# Altium PCB PCB.PcbDoc
Units mm, origin at the board's own origin, x right, y up, seen from the top; angles counter-clockwise.
Board outline 95.2 x 56.6 mm, 2 copper layers (Top Layer, Bottom Layer); 21 components, 25 nets, 99 pads, 0 vias.
Unrouted connection lines stored in the file: 1.
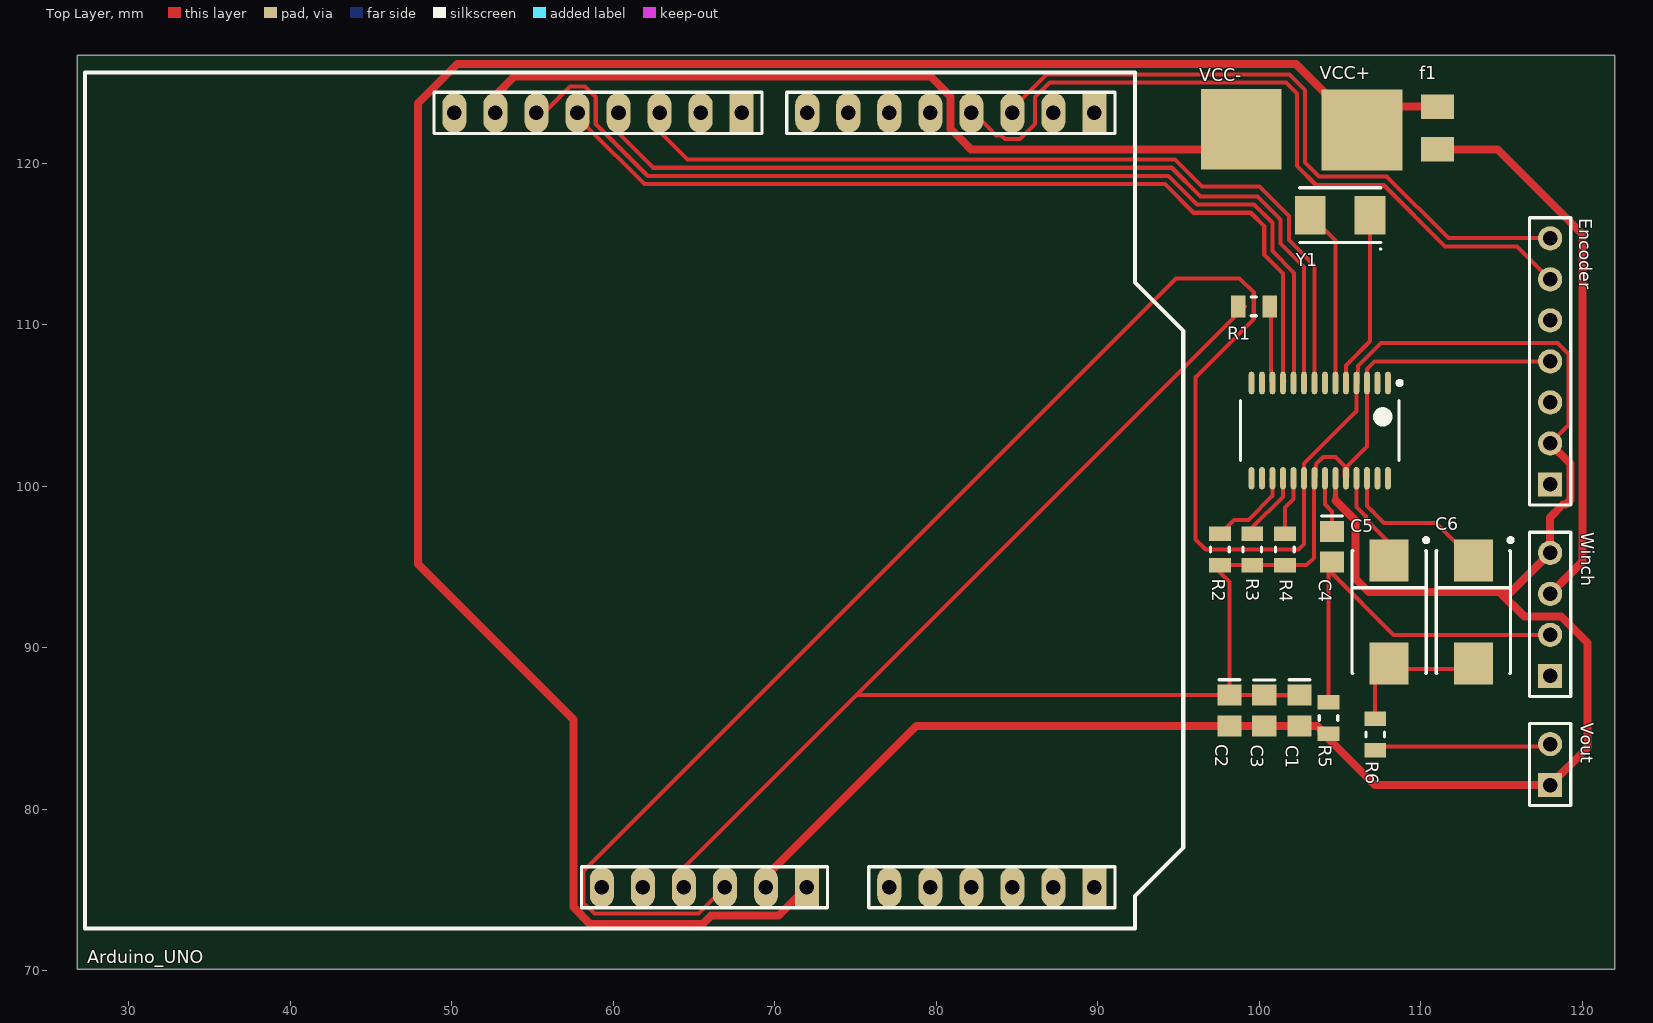
[diagram p0: Top Layer view]
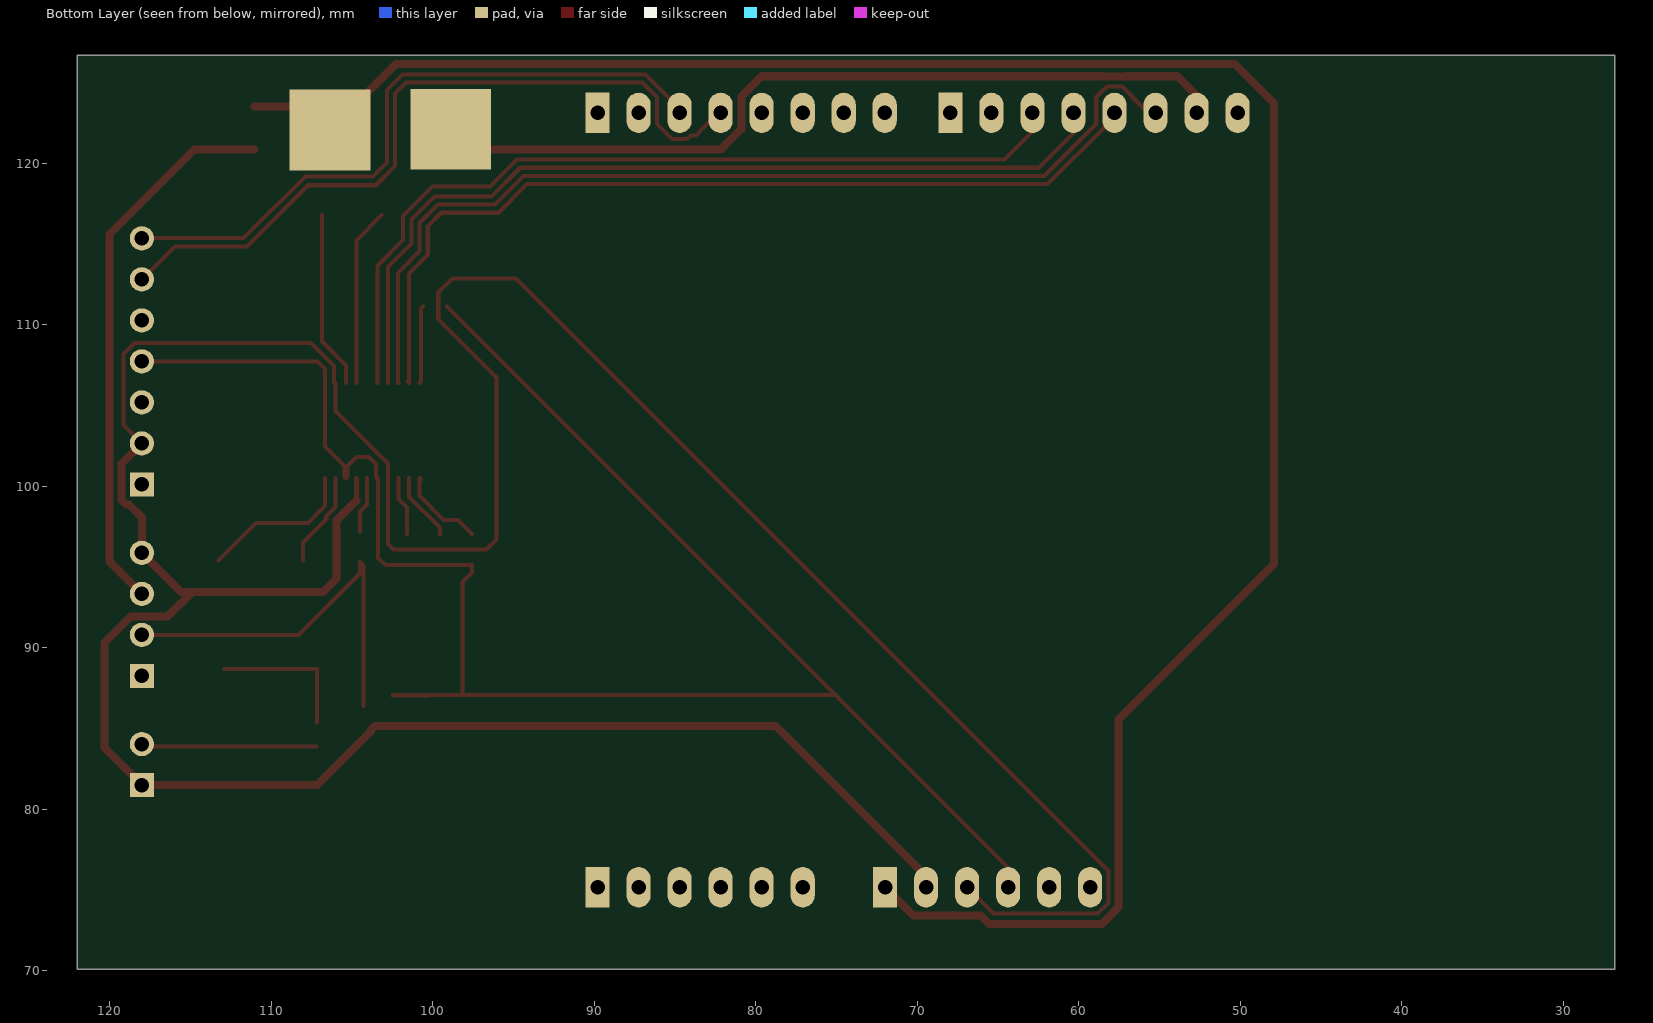
[diagram p1: Bottom Layer view, seen from below]

## Layer stack, top to bottom
Top Solder: solder mask 0.0102, Solder Resist, Dk 3.5
Top Layer: signal copper 0.0356
Dielectric 1: dielectric 0.32, FR-4, Dk 4.8
Bottom Layer: signal copper 0.0356
Bottom Solder: solder mask 0.0102, Solder Resist, Dk 3.5

## Board outline
26.825,70.1 122.025,70.1 122.025,126.425 122.025,126.575 122.025,126.6 122.025,126.7 26.825,126.7

## Design rules (kind name [scope] priority, off if disabled: settings)
Clearance [All] p1: gap=0.254
PolygonConnect [All] p1: connectstyle=Relief reliefconductorwidth=0.254 reliefentries=4 polygonreliefangle="90 Angle" airgapwidth=0.254
RoutingVias [All] p1: holewidth=0.711 width=1.27 viastyle="Through Hole" minholewidth=0.711 minwidth=1.27 maxholewidth=0.711 maxwidth=1.27
SolderMaskExpansion [All] p1: expansion=0.102
Width [All] p1: maxlimit=0.5 minlimit=0.254 preferedwidth=0.254 bottomlayer_maxwidth=0.254 minimp=50.000000 maximp=50.000000 favimp=50.000000
30 further rules are at their usual default settings.

## Classes and differential pairs
component class Schematic: Arduino_UNO C1 C2 C3 C4 C5 C6 Encoder f1 R1 R2 R3 R4 R5 R6

## Components (designator, comment, footprint, x,y, rotation, side; value= is the part's Value field where it differs from the comment)
Arduino_UNO "MCU" MCU 27.309,72.634 r90 top
C1 "C0805" 0805 102.5,86.125 r270 top
C2 "C0805" 0805 98.167,86.128 r270 top
C3 "C0805" 0805 100.326,86.123 r270 top
C4 "C0805" 0805 104.525,96.275 r270 top
C5 "T491D" D 108.05,92.225 r270 top
C6 "T491D" D 113.275,92.225 r270 top
Encoder "Header 7" HDR1X7 118.025,100.125 r90 top
f1 "Bel Fuse" Bel_Fuse 111.05,122.2 r90 top
R1 "Res3" RESC2012 99.675,111.15 r0 top
R2 "Res3" RESC2012 97.575,96.087 r270 top
R3 "Res3" RESC2012 99.575,96.1 r270 top
R4 "Res3" RESC2012 101.6,96.1 r270 top
R5 "Res3" RESC2012 104.3,85.675 r90 top
R6 "Res3" RESC2012 107.2,84.65 r270 top
VCC+ "VCC_IN+" VCC_Pad 106.35,122.025 r0 top
VCC- "VCC_IN-" VCC_Pad 98.875,122.075 r0 top
Vout "Header 2" HDR1X2 118.025,81.51 r90 top
Winch "Header 4" HDR1X4 118.025,88.27 r90 top
Y1 "XTAL" ABM3-27.000MHZ-D2Y-T 105.025,116.8 r180 top
? "MAX7456" TSSOP(max7456)NoPad 103.759,103.458 r270 top

## Footprints (in the part's own frame and the unit in brackets; to place one, negate y for a bottom-side part, rotate by r counter-clockwise, add the part's x,y. Pads: shape width x height; smd on the part's side, far side on the other; paste and mask are expansions set on the pad)
0805 [mm] "Chip Capacitor; Body 2.0 x 1.2 mm (LxW typ)"
  rect 1.3x1.5 smd: 1(-0.95,0) 2(0.95,0)
  silkscreen extent -1.9,-0.65 -1.9,0.65
ABM3-27.000MHZ-D2Y-T [mm] "DFN, 2-Leads, Body 3,30x5,01mm, Pitch 3,70mm, IPC Medium Density"
  rect 1.9x2.4 smd: 1(-1.85,0) 2(1.85,0)
  silkscreen extent -2.56,-1.7 2.51,2.15, body extent -2.51,-1.7 2.51,1.7, height 1.3
Bel_Fuse [mm] "Molded Capacitor, 2-Leads, Body 3,30x1,59mm, IPC Medium Density"
  rect 1.52x2.03 smd: 1(-1.325,0) 2(1.325,0)
  body extent -1.92,-0.8 1.92,0.8, height 0.6
D [mm] "Capacitor, SM Tantalum; Body 7.3 x 4.3 mm (LxW typ)"
  rect 2.6x2.4 smd: 1(-3.2,0) 2(3.2,0)
  silkscreen extent -4.57,-2.3 3.8,2.43
HDR1X2 [mm] "Connector; Header; 2 Position"
  rect 1.5x1.5 hole 0.9: 1(0,0)
  round 1.5 hole 0.9: 2(2.54,0)
  silkscreen extent -1.27,-1.27 3.81,1.27
HDR1X4 [mm] "Connector; Header; 4 Position"
  rect 1.5x1.5 hole 0.9: 1(0,0)
  round 1.5 hole 0.9: 2(2.54,0) 3(5.08,0) 4(7.62,0)
  silkscreen extent -1.27,-1.27 8.89,1.27
HDR1X7 [mm] "Connector; Header; 7 Position"
  rect 1.5x1.5 hole 0.9: 1(0,0)
  round 1.5 hole 0.9: 2(2.54,0) 3(5.08,0) 4(7.62,0) 5(10.16,0) 6(12.7,0) 7(15.24,0)
  silkscreen extent -1.27,-1.27 16.51,1.27
MCU [mm]
  rect 2.5x1.5 hole 0.9: 0(50.5,-62.5) 8(50.5,-40.65) A5(2.55,-62.5) Vin(2.55,-44.7)
  oval 2.5x1.5 hole 0.9: 1(50.5,-59.96) 2(50.5,-57.42) 3(50.5,-54.88) 3.3V(2.55,-34.54) 4(50.5,-52.34) 5(50.5,-49.8) 5V(2.55,-37.08) 6(50.5,-47.26) 7(50.5,-44.72) 9(50.5,-38.11) 10(50.5,-35.57) 11(50.5,-33.03) 12(50.5,-30.49) 13(50.5,-27.95) A0(2.55,-49.8) A1(2.55,-52.34) A2(2.55,-54.88) A3(2.55,-57.42) A4(2.55,-59.96) AREF(50.5,-22.87) GND(2.55,-42.16) GND(2.55,-39.62) GND(50.5,-25.41) RST(2.55,-32)
  silkscreen extent 0,-68 53,0
RESC2012 [mm] "Chip Resistor, 2-Leads, Body 2,05x1,30mm, IPC Medium Density"
  rect 0.9x1.35 smd: 1(-0.975,0) 2(0.975,0)
  silkscreen extent -0.15,-0.58 0.15,0.58, body extent -1.05,-0.67 1.05,0.67, height 0.6
TSSOP(max7456)NoPad [mm] "TSOP, 28-Leads, Body 9,70x4,40mm, Pitch 0,65mm, Thermal Pad 3,10x3,90mm, IPC Medium Density"
  oval 1.4x0.35 smd: 1(-2.95,4.225) 2(-2.95,3.575) 3(-2.95,2.925) 4(-2.95,2.275) 5(-2.95,1.625) 6(-2.95,0.975) 7(-2.95,0.325) 8(-2.95,-0.325) 9(-2.95,-0.975) 10(-2.95,-1.625) 11(-2.95,-2.275) 12(-2.95,-2.925) 13(-2.95,-3.575) 14(-2.95,-4.225) 15(2.95,-4.225) 16(2.95,-3.575) 17(2.95,-2.925) 18(2.95,-2.275) 19(2.95,-1.625) 20(2.95,-0.975) 21(2.95,-0.325) 22(2.95,0.325) 23(2.95,0.975) 24(2.95,1.625) 25(2.95,2.275) 26(2.95,2.925) 27(2.95,3.575) 28(2.95,4.225)
  silkscreen extent -3.07,-4.9 1.85,5.08, body extent -3.19,-4.9 3.19,4.9, height 1.1
VCC_Pad [mm]
  rect 5x5 all layers, no hole: 0(0.025,0.05)

## Part data
C1 C2 C3 C4: "Ceramic Chip Capacitor - Standard"
C5 C6: "Solid Tantalum Chip Capacitor, Standard T491 Series - Industrial Grade"
Encoder: "Header, 7-Pin"
R1 R2 R3 R4 R5 R6: "Resistor"
Vout: "Header, 2-Pin"
Winch: "Header, 4-Pin"
Y1: "Crystal Oscillator"

## Nets (pads, with @x,y where several pads share a name; then routed paths per layer and width w, separated by ;. In a path a pad name is that pad's centre, name@x,y a point inside that pad or via, vN(x,y) a via of type N, cw(c..) or ccw(c..) an arc to the next point about the centre after c; other vN are vias at no path point)
CASEGND: Encoder.1
CS: ?.8 Arduino_UNO.10 | length 53.3
  Top Layer w0.254: Arduino_UNO.10 62.879,121.971 64.609,120.241 85.72,120.241 85.723,120.244 94.806,120.244 96.475,118.575 100.025,118.575 101.844,116.756 101.844,115.256 103.434,113.666 ?.8
GND: ?.4 ?.20 ?.23 Arduino_UNO.GND C1.2 C2.2 C3.2 Encoder.2 R5.1 VCC-.0 Vout.1 Winch.4 | length 275.6
  Top Layer w0.254: Arduino_UNO.GND@52.719,123.134 Arduino_UNO.GND@52.719,124.219 ; Arduino_UNO.GND@66.929,75.184 65.295,73.55 58.844,73.55 58.178,74.216 58.178,74.447 58.178,76.203 94.85,112.875 98.8,112.875 99.675,112 99.675,110.361 96.075,106.761 96.075,96.725 96.7,96.1 102.45,96.1 102.775,96.425 102.775,100.499 ?.20 102.784,101.409 106.034,104.659 ?.4 106.128,106.408 106.128,107.454 107.55,108.876 118.493,108.876 119.156,108.213 119.156,103.796 Encoder.2 ; VCC-.0@97.65,120.875 VCC-.0 VCC-.0@98.975,122.05 ; C3.2@100.321,85.178 C3.2 ; C1.2 C1.2 ; R5.1@103.85,84.825 R5.1@103.85,84.925
  Top Layer w0.3: 104.734,99.141 ?.23
  Top Layer w0.5: Arduino_UNO.GND@52.719,124.219 53.9,125.4 57.065,125.4 57.069,125.396 58.529,125.396 58.533,125.4 79.656,125.4 80.903,124.153 80.903,122.147 81.67,121.38 82.175,120.875 83.996,120.875 83.999,120.872 85.459,120.872 85.462,120.875 VCC-.0@97.65,120.875 ; Arduino_UNO.GND@69.469,75.184 69.469,75.869 78.778,85.178 C2.2 C3.2@100.321,85.178 ; C3.2 C1.2 ; C1.2 103.6,85.175 R5.1@103.85,84.925 ; R5.1@103.85,84.825 107.165,81.51 Vout.1 120.35,83.835 120.35,90.3 118.709,91.941 116.434,91.941 114.9,93.475 ; 104.734,99.141 105.975,97.9 105.975,94.287 106.641,93.621 106.654,93.621 106.8,93.475 114.9,93.475 ; Encoder.2 119.279,101.411 119.279,99.166 118.984,98.871 118.81,98.871 118.025,98.086 Winch.4 115.61,93.475 114.9,93.475
INDEX: Encoder.5
Net_5: ?.5 Y1.1 | length 11
  Top Layer w0.254: ?.5 105.384,107.496 106.879,108.991 106.879,116.796 Y1.1
Net_6: ?.6 Y1.2 | length 11
  Top Layer w0.254: Y1.2 104.734,115.241 ?.6
Net_12: ?.12 R1.2 | length 4.8
  Top Layer w0.254: R1.2@100.625,111.15 100.74,111.035 100.74,106.502 ?.12 ?.12@100.838,106.412
Net_17: ?.17 R2.1 | length 5.5
  Top Layer w0.254: R2.1@97.612,97.062 R2.1 98.447,97.934 99.341,97.934 100.834,99.427 ?.17 ?.17@100.74,100.414
Net_18: ?.18 R3.1 | length 4.2
  Top Layer w0.254: R3.1 99.575,97.45 101.484,99.359 ?.18 ?.18@101.473,100.497
Net_19: ?.19 R4.1 | length 3.7
  Top Layer w0.254: R4.1 101.6,98.7 102.125,99.225 102.125,100.499 ?.19
Net_22: ?.22 C4.1 | length 3.5
  Top Layer w0.254: ?.22 104.084,98.899 104.525,98.458 C4.1
Net_25: ?.25 C5.1 | length 5.9
  Top Layer w0.254: ?.25 106.034,98.733 106.606,98.161 106.606,97.987 108.05,96.543 C5.1
Net_26: ?.26 C6.1 | length 9.7
  Top Layer w0.254: ?.26 106.684,98.802 107.114,98.372 107.114,98.361 107.725,97.75 110.95,97.75 C6.1
NetC5_2: C5.2 C6.2 R6.1 | length 9
  Top Layer w0.254: R6.1@107.2,85.4 107.188,85.412 107.188,88.701 C6.2@112.903,88.701
Netf1_1: f1.1 Winch.3 | length 34.3
  Top Layer w0.5: f1.1 114.777,120.875 120.033,115.619 120.033,95.358 Winch.3
NetR6_2: R6.2 Vout.2 | length 10.9
  Top Layer w0.254: R6.2@107.2,83.9 117.875,83.9 Vout.2
NOTUSED: Encoder.3
OUTPUTA: Arduino_UNO.2 Encoder.7 | length 41.3
  Top Layer w0.254: Arduino_UNO.2 84.729,123.412 86.831,125.514 101.879,125.514 102.858,124.535 102.858,120.053 103.717,119.194 107.906,119.194 111.725,115.375 118.015,115.375 Encoder.7
OUTPUTB: Arduino_UNO.3 Encoder.6 | length 46.6
  Top Layer w0.254: Arduino_UNO.3 82.316,123.134 83.236,122.214 83.721,121.729 84.035,121.729 84.261,121.503 85.197,121.503 86.138,122.444 86.138,122.944 86.138,124.102 87.042,125.006 101.669,125.006 102.35,124.325 102.35,119.843 103.543,118.65 107.732,118.65 111.515,114.867 115.983,114.867 Encoder.6
SCLK: ?.10 Arduino_UNO.13 | length 61.2
  Top Layer w0.254: Arduino_UNO.13 55.709,123.134 56.668,124.093 56.668,124.102 57.331,124.765 58.267,124.765 58.93,124.102 58.93,123.602 58.93,122.444 62.149,119.225 86.141,119.225 86.144,119.228 94.385,119.228 96.155,117.458 99.699,117.458 100.828,116.329 100.828,114.572 102.177,113.223 102.177,106.408 ?.10
SDIN: ?.9 Arduino_UNO.11 | length 55.2
  Top Layer w0.254: Arduino_UNO.11 60.339,121.886 62.492,119.733 85.931,119.733 85.934,119.736 94.596,119.736 96.366,117.966 99.909,117.966 101.336,116.539 101.336,115.046 102.784,113.598 ?.9
SDOUT: ?.11 Arduino_UNO.12 | length 56
  Top Layer w0.254: Arduino_UNO.12 57.923,123.134 58.422,122.635 58.422,122.233 61.938,118.717 86.351,118.717 86.354,118.72 94.175,118.72 95.945,116.95 99.488,116.95 100.32,116.118 100.32,114.362 101.484,113.198 ?.11 ?.11@101.578,106.502
VCC_5V: ?.3 ?.21 ?.24 Arduino_UNO.5V C1.1 C2.1 C3.1 Encoder.4 R1.1 R2.2 R3.2 R4.2 | length 119.7
  Top Layer w0.254: Arduino_UNO.5V 64.389,76.414 75.1,87.125 ; R1.1@99.125,111.15 75.1,87.125 ; C1.1 C1.1 C3.1 100.321,87.078 C2.1 ; Encoder.4 107.145,107.745 106.684,107.284 ?.3 106.684,102.469 105.478,101.263 105.478,100.602 ?.24 105.29,100.602 105.29,101.263 104.728,101.825 103.975,101.825 103.528,101.378 103.528,100.602 ?.21 103.394,100.468 103.394,95.569 102.95,95.125 R4.2 R3.2 97.588,95.125 R2.2 97.575,94.675 98.167,94.083 C2.1 ; 75.1,87.125 75.147,87.078 C2.1
VCC_12V: Arduino_UNO.Vin f1.2 VCC+.0 | length 136
  Top Layer w0.5: Arduino_UNO.Vin 70.247,73.422 66.059,73.422 65.556,72.919 58.582,72.919 57.547,73.954 57.547,85.578 47.925,95.2 47.925,123.725 50.354,126.154 102.296,126.154 VCC+.0 107.825,123.525 f1.2
VIN_VIDEO: C4.2 R5.2 Winch.2 | length 24.8
  Top Layer w0.254: R5.2@104.3,86.425 104.3,95.1 C4.2 104.525,94.625 108.34,90.81 Winch.2
pads on no net: ?.1 ?.2 ?.7 ?.13 ?.14 ?.15 ?.16 ?.27 ?.28 Arduino_UNO.0 Arduino_UNO.1 Arduino_UNO.3.3V Arduino_UNO.4 Arduino_UNO.5 Arduino_UNO.6 Arduino_UNO.7 Arduino_UNO.8 Arduino_UNO.9 Arduino_UNO.A0 Arduino_UNO.A1 Arduino_UNO.A2 Arduino_UNO.A3 Arduino_UNO.A4 Arduino_UNO.A5 Arduino_UNO.AREF Arduino_UNO.RST Winch.1